# EAGLE board FlasherSchematic (EAGLE 7.1.0)
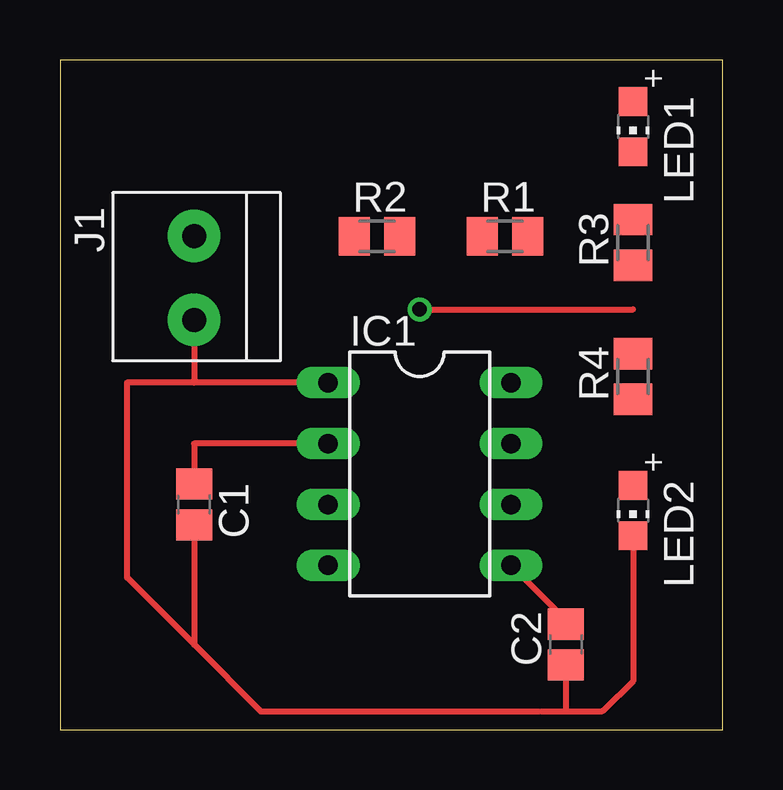
[diagram p0: board, top side]
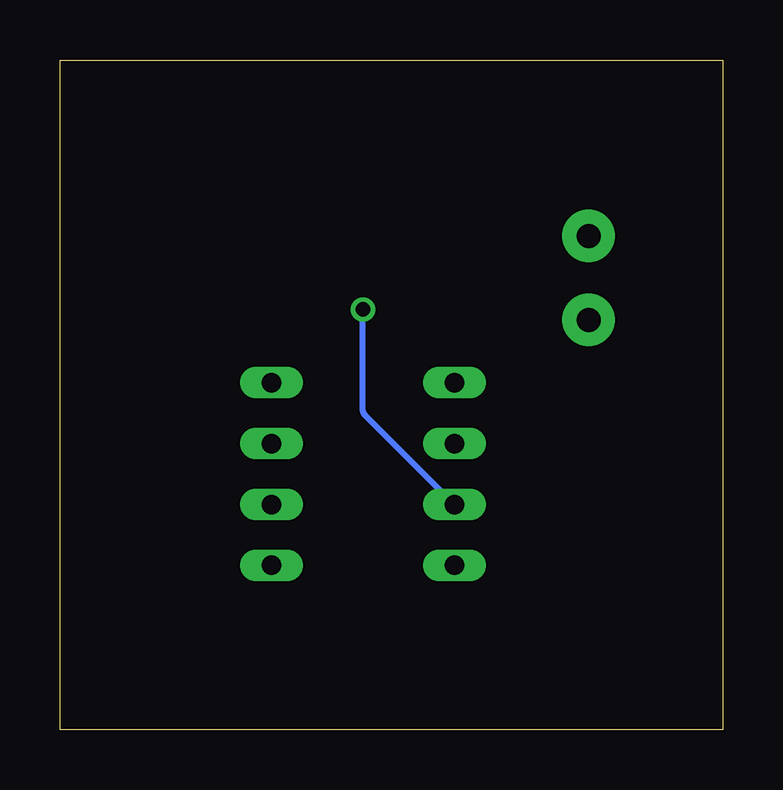
[diagram p1: board, bottom side, seen from below]

Size 27.61 x 27.93 mm. Coordinates in mm from the lower left corner, seen from the top.
Outline: 0,0 27.61,0 27.61,27.93 0,27.93 0,0
Copper layers (1*16): Top 0.035mm / dielectric 1.5mm / Bottom 0.035mm
Design rules "default": minimum track width 10mil, minimum drill 24mil, track to track 8mil, track to pad 8mil, pad to pad 8mil, via to via 8mil, smd to smd 8mil, copper to edge 40mil, drill to drill 8mil, minimum pad ring 10mil, minimum via ring 8mil, stop-mask expansion 4mil, vias tented up to drill 0mil, thermal gap 10mil

## Footprints (pad centres in the part's own frame; a part is rotated, then mirrored left to right if it is on the bottom)
C0805 = smd 1.3 x 1.5: 1 -0.85,0; 2 0.85,0
DIL-08 = drill 0.813 long: 1 -3.81,-3.81; 2 -1.27,-3.81; 3 1.27,-3.81; 4 3.81,-3.81; 5 3.81,3.81; 6 1.27,3.81; 7 -1.27,3.81; 8 -3.81,3.81
1X2-3.5MM = drill 1 pad 2.184: 1 1.8,0; 2 -1.7,0
CHIP-LED0805 = smd 1.2 x 1.2: A 0,-1.05; C 0,1.05
M0805 = smd 1.3 x 1.6: 1 -0.95,0; 2 0.95,0

## Placement (x,y rotation side)
C1  1u  [C0805]  5.59,9.4 270 top
C2  1n  [C0805]  21.08,3.56 90 top
IC1  NE555  [DIL-08]  14.99,10.67 270 top
J1  1X2-3.5MM  [1X2-3.5MM]  5.59,18.8 90 top
LED1  RED  [CHIP-LED0805]  23.88,25.15 180 top
LED2  RED  [CHIP-LED0805]  23.88,9.14 180 top
R1  1K  [M0805]  18.54,20.57 0 top
R2  470K  [M0805]  13.21,20.57 0 top
R3  220  [M0805]  23.88,20.32 90 top
R4  220  [M0805]  23.88,14.73 90 top

## Library data of the parts
C1 C2 J1 LED1 LED2 R1-R4 = adafruit
IC1 = st-microelectronics; MF: Arrow Electronics; MPN: NE555N; OC_FARNELL: 1467742; OC_NEWARK: 89K1486

## Nets
S$1: IC1.5
S$3: IC1.2
S$5: IC1.1
S$6: IC1.3

## Tracks (layer width: path | path; a pad name or v marks a point on that pad's centre or on a via)
S$1
  Top 0.254: IC1.5 20.75,4.9 arc45 20.93,4.83 21.08,4.83
S$3
  Top 0.254: IC1.2 5.59,11.94 5.59,10.16
S$5
  Top 0.254: 19.96,0.76 8.38,0.76 5.59,3.56 | IC1.1 5.59,14.48 | 5.59,14.48 2.79,14.48 2.79,6.35 5.59,3.56 | 5.59,17.02 5.59,14.48 | 5.59,8.38 5.59,3.56
S$6  (via drill 0.6)
  Top 0.254: v14.99,17.53 23.88,17.53
  Bottom 0.254: IC1.3 14.91,13.13 arc45 14.99,13.31 v14.99,17.53
S$7
  Top 0.254: 23.88,7.87 23.88,2.03 22.68,0.84 arc-45 22.5,0.76 21.08,0.76 | 21.08,0.76 20.07,0.76 | 21.08,2.29 21.08,0.76